# Altium PCB PCB1.PcbDoc (part 1 of 2)
Units mil, origin at the board's own origin, x right, y up, seen from the top; angles counter-clockwise.
Board outline 2342.52 x 4192.91 mil, 4 copper layers (Top Layer, Ground Layer, Power Layer, Bottom Layer), stack 58.662 mil thick; 150 components, 92 nets, 452 pads, 265 vias.
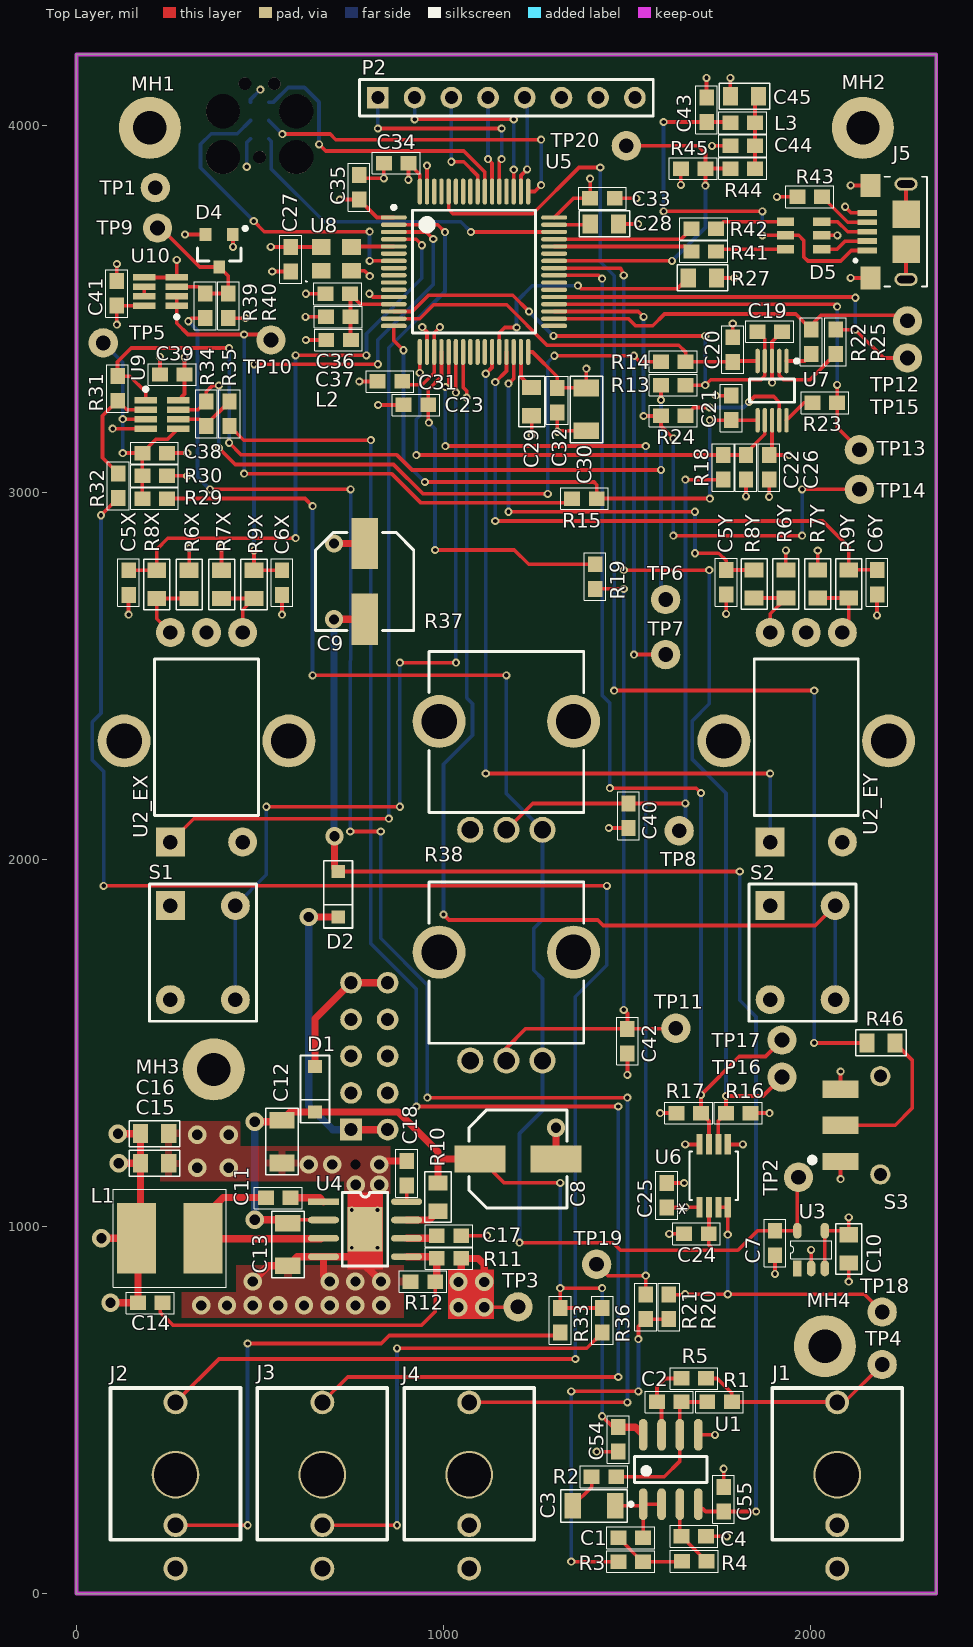
[diagram p0: Top Layer view]
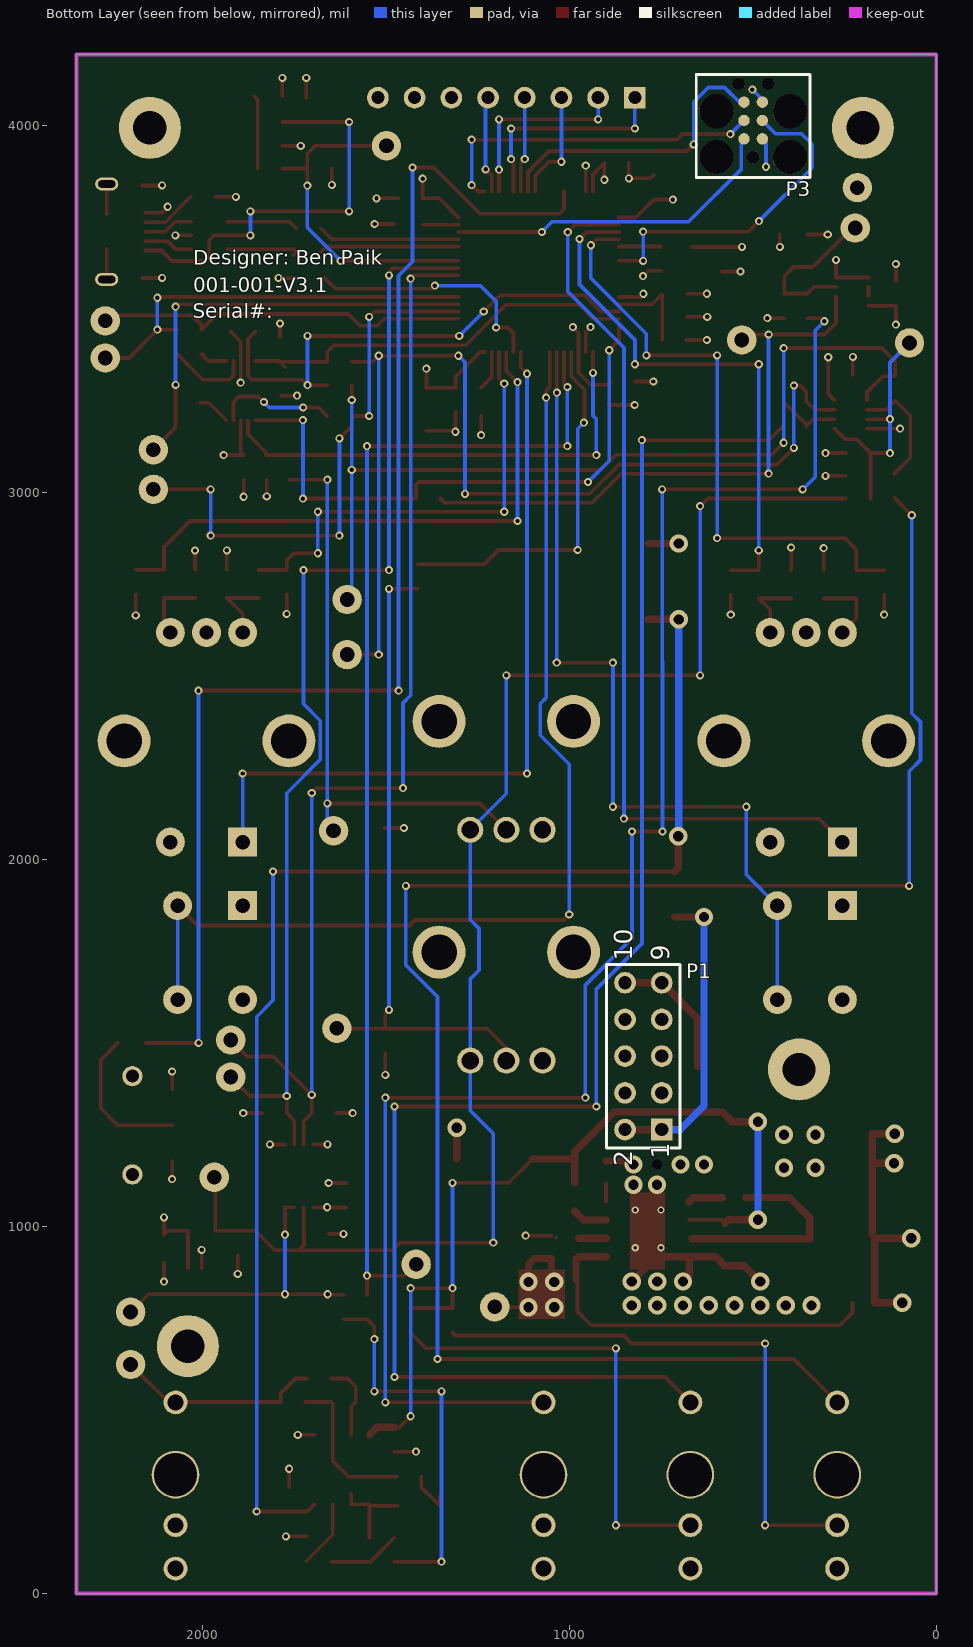
[diagram p1: Bottom Layer view, seen from below]
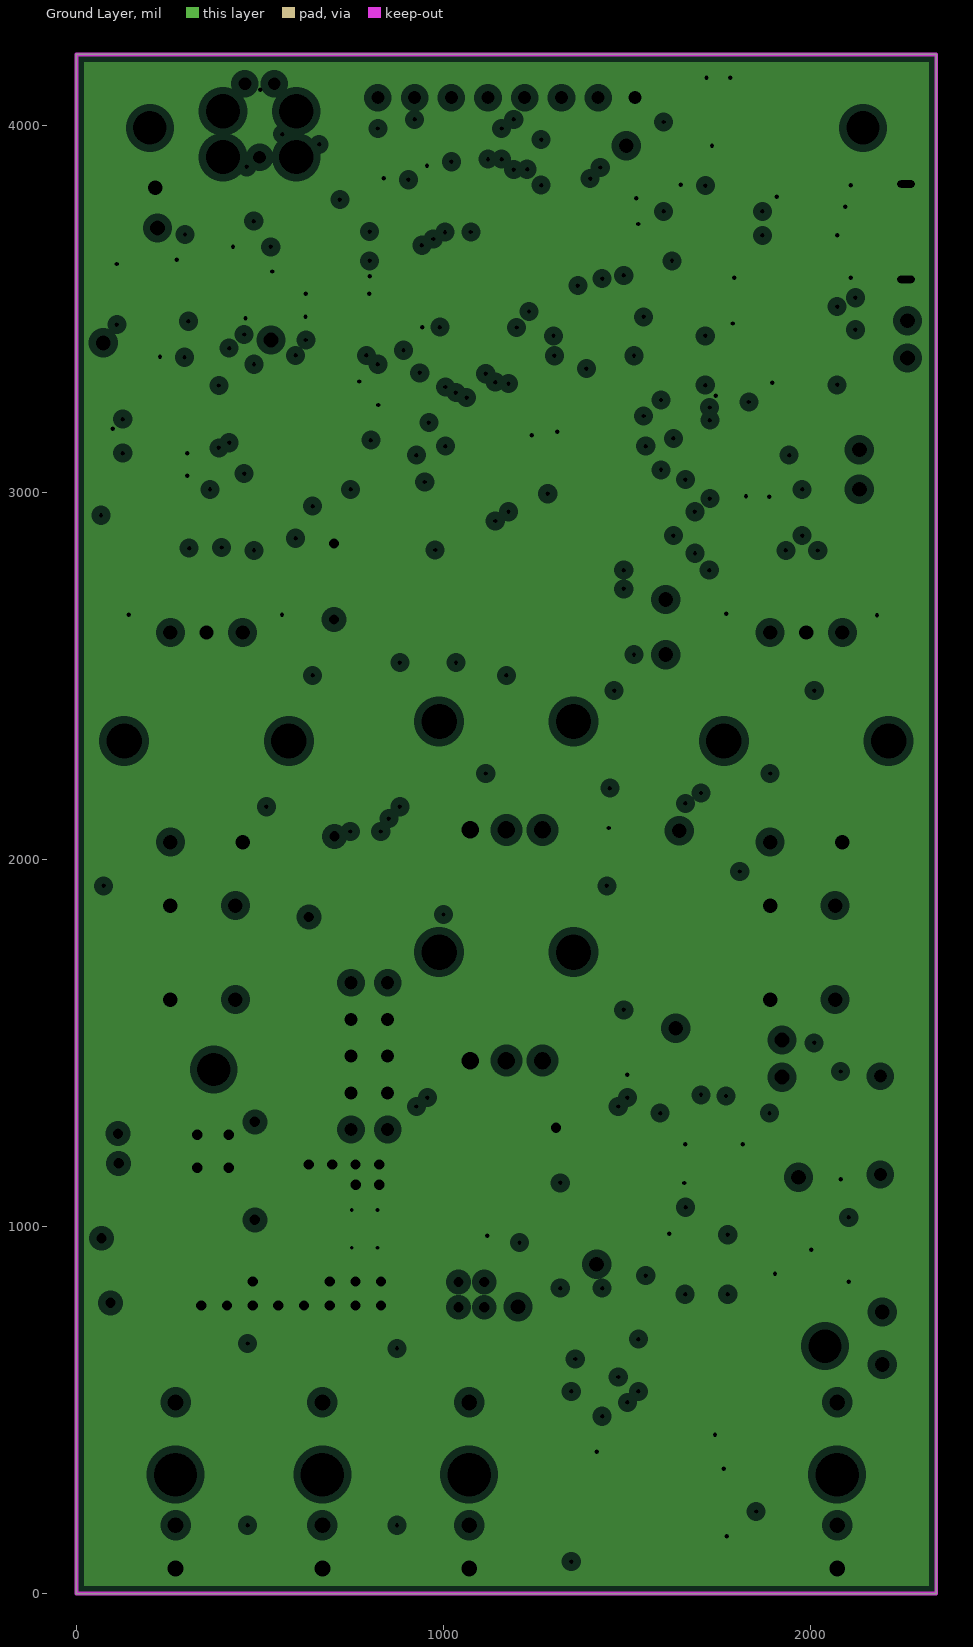
[diagram p2: Ground Layer, clearances drawn from the general rule]
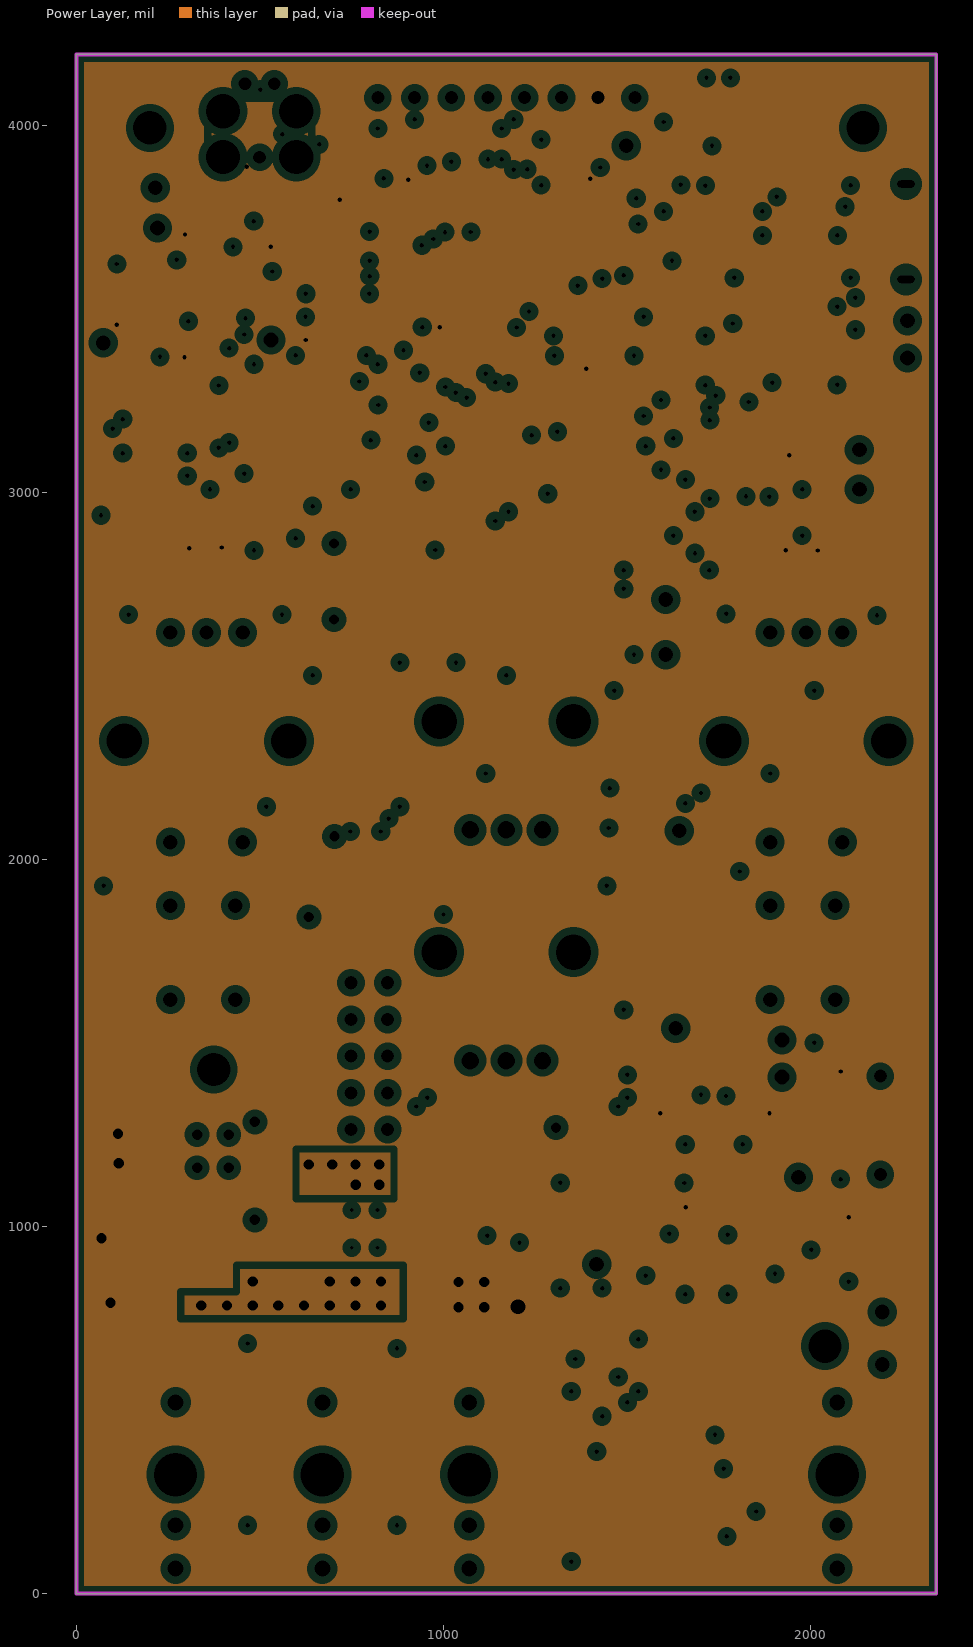
[diagram p3: Power Layer, clearances drawn from the general rule]
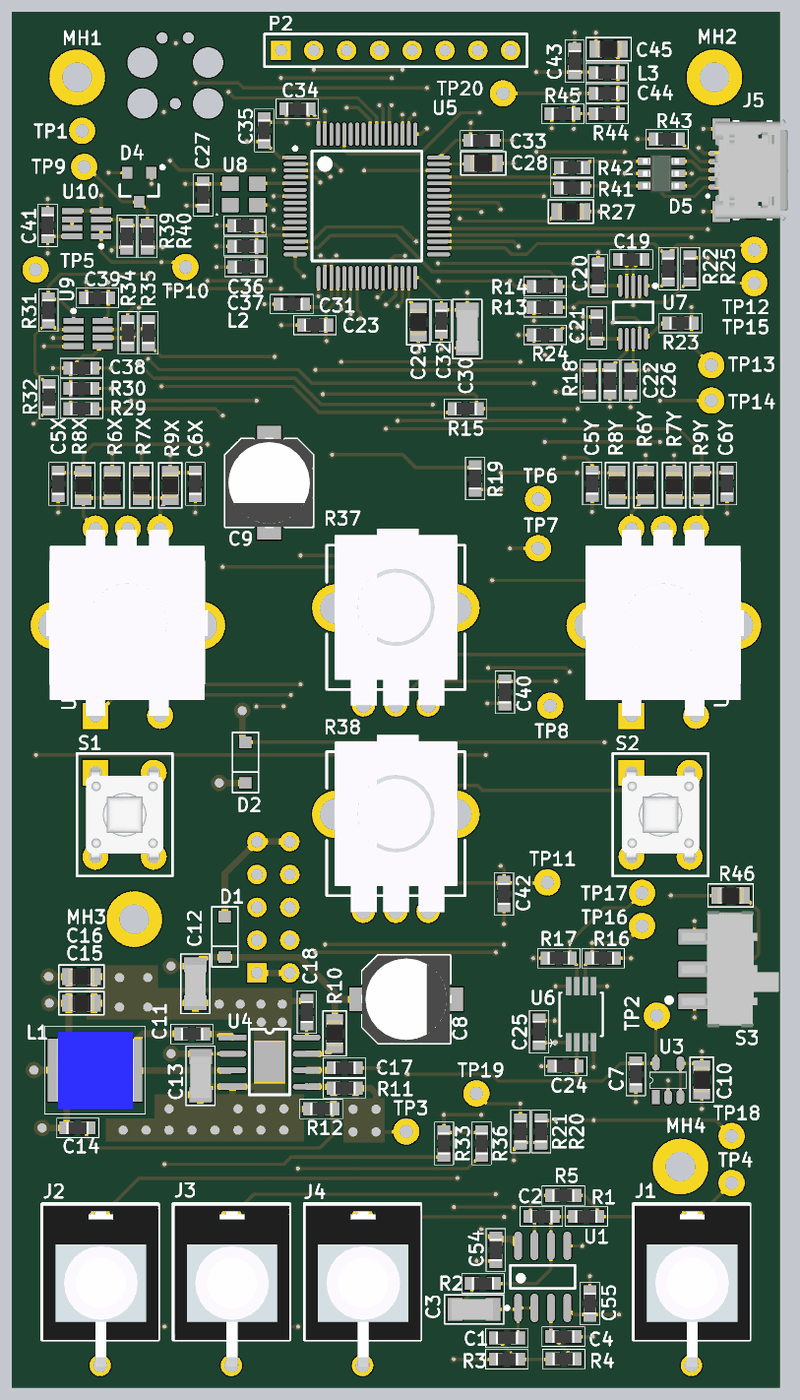
[diagram p5: 3D render of the assembled board from above, using the file's embedded part models]

## Layer stack, top to bottom
Top Solder: solder mask 1, Solder Resist, Dk 3.5
Top Layer: signal copper 1.378
Dielectric 1: core 4.33, FR-4, Dk 4.29
Ground Layer: plane copper 1.378, net GND
Dielectric 2: prepreg 44.49, FR-4, Dk 3.96
Power Layer: plane copper 1.378, net (Multiple Nets)
Dielectric 3: core 4.33, FR-4, Dk 4.29
Bottom Layer: signal copper 1.378
Bottom Solder: solder mask 1, Solder Resist, Dk 3.5

## Board outline
0,0 2342.52,0 2342.52,4192.91 0,4192.91

## Design rules (kind name [scope] priority, off if disabled: settings)
AssemblyTestPointUsage AssemblyTestPointUsage_1 [All] p2:
AssemblyTestpoint AssemblyTestpoint_1 [All] p2: testpointundercomponent=TRUE minsize=40 maxsize=100 preferedsize=60 minholesize=0 maxholesize=40 preferedholesize=32 testpointgrid=1 usegrid=TRUE gridtolerance=0.01 allowsidetop=TRUE allowsidebottom=TRUE
Clearance Clearance_1 [All] p1: gap=8 ignorepadtopadclearanceinfootprint=FALSE except(0: Arc-Hole Track-Hole SMDPad-Hole THPad-Hole Via-Hole Fill-Hole Poly-Hole Region-Hole Text-Hole; 5: SMDPad-SMDPad)
Clearance Clearance_3 [All] p2: gap=10 ignorepadtopadclearanceinfootprint=FALSE except(0: Arc-Hole Track-Hole SMDPad-Hole THPad-Hole Via-Hole Fill-Hole Poly-Hole Region-Hole Text-Hole)
Clearance Clearance_2 [All] p3: gap=10 ignorepadtopadclearanceinfootprint=FALSE except(0: Arc-Hole Track-Hole SMDPad-Hole THPad-Hole Via-Hole Fill-Hole Poly-Hole Region-Hole Text-Hole)
Clearance [All] p4: gap=10 ignorepadtopadclearanceinfootprint=FALSE except(0: Arc-Hole Track-Hole SMDPad-Hole THPad-Hole Via-Hole Fill-Hole Poly-Hole Region-Hole Text-Hole)
ComponentClearance ComponentClearance_1 [All] p2: gap=10 collisioncheckmode=3 verticalgap=10 showdistances=FALSE
DiffPairsRouting DiffPairsRouting_1 [All] p2: maxlimit=10 minlimit=10 mostfreqgap=10 toplayer_minwidth=15 toplayer_maxwidth=15 toplayer_prefwidth=15 bottomlayer_minwidth=15 bottomlayer_maxwidth=15 bottomlayer_prefwidth=15 maxuncoupledlength=500
FabricationTestPointUsage FabricationTestPointUsage_1 [All] p2: valid=0 allowmultiple=FALSE
FabricationTestpoint FabricationTestpoint_1 [All] p2: side=3 testpointundercomponent=TRUE minsize=40 maxsize=100 preferedsize=60 minholesize=0 maxholesize=40 preferedholesize=32 testpointgrid=1 allowsidetop=TRUE allowsidebottom=TRUE usegrid=TRUE gridtolerance=0.01
FanoutControl Fanout_LCC [IsLCC] p1: bgadir=Out bgaviamode=Centered fanoutstyle=Auto fanoutdirection=Alternating viagrid=1 // Fanout_LCC (Default Rule)
FanoutControl Fanout_BGA [IsBGA] p2: bgadir=Out bgaviamode=Centered fanoutstyle=Auto fanoutdirection=Alternating viagrid=1 // Fanout_BGA (Default Rule)
FanoutControl Fanout_Default [All] p4: bgadir=Out bgaviamode=Centered fanoutstyle=Auto fanoutdirection=Alternating viagrid=1 // Fanout_Default (Default Rule)
FanoutControl Fanout_Small [(CompPinCount < 5)] p5: bgadir=Out bgaviamode=Centered fanoutstyle=Auto fanoutdirection=OutThenIn viagrid=1 // Fanout_Small (Default Rule)
FanoutControl Fanout_BGA_1 [IsBGA] p6: bgadir=Out bgaviamode=Centered fanoutstyle=Auto fanoutdirection=Alternating viagrid=1 // Fanout_BGA (Default Rule)
FanoutControl Fanout_LCC_1 [IsLCC] p7: bgadir=Out bgaviamode=Centered fanoutstyle=Auto fanoutdirection=Alternating viagrid=1 // Fanout_LCC (Default Rule)
FanoutControl Fanout_SOIC_1 [IsSOIC] p8: bgadir=Out bgaviamode=Centered fanoutstyle=Auto fanoutdirection=Alternating viagrid=1 // Fanout_SOIC (Default Rule)
FanoutControl Fanout_Small_1 [(CompPinCount < 5)] p9: bgadir=Out bgaviamode=Centered fanoutstyle=Auto fanoutdirection=OutThenIn viagrid=1 // Fanout_Small (Default Rule)
FanoutControl Fanout_Default_1 [All] p10: bgadir=Out bgaviamode=Centered fanoutstyle=Auto fanoutdirection=Alternating viagrid=1 // Fanout_Default (Default Rule)
Height Height_1 [All] p2: minheight=0 maxheight=1000 prefheight=500
HoleSize HoleSize_1 [All] p1: absolutevalues=TRUE maxlimit=150 minlimit=1 maxpercent=80.000 minpercent=20.000
HoleSize [All] p2: absolutevalues=TRUE maxlimit=100 minlimit=1 maxpercent=80.000 minpercent=20.000
HoleToHoleClearance HoleToHoleClearance_1 [All] p2: gap=10 allowstackedmicrovias=TRUE
LayerPairs LayerPairs_1 [All] p2: enforce=TRUE
MinimumSolderMaskSliver MinimumSolderMaskSliver_1 [All] p1: minsoldermaskwidth=1
MinimumSolderMaskSliver [All] p2: minsoldermaskwidth=10
NetAntennae NetAntennae_1 [All] p2: netantennaetolerance=0
PasteMaskExpansion PasteMaskExpansion_1 [All] p2: expansion=0
PlaneClearance [All] p1: clearance=20
PlaneClearance PlaneClearance_1 [All] p2: clearance=20
PlaneConnect PlaneConnect_Default [All] p1: planeconnectstyle=Direct reliefexpansion=20 reliefentries=4 reliefconductorwidth=10 reliefairgap=10
PlaneConnect [All] p2: planeconnectstyle=Relief reliefexpansion=20 reliefentries=4 reliefconductorwidth=10 reliefairgap=10
PlaneConnect PlaneConnect_Pad [IsPad] p3: planeconnectstyle=Relief reliefexpansion=20 reliefentries=4 reliefconductorwidth=10 reliefairgap=10
PolygonConnect [All] p1: connectstyle=Relief reliefconductorwidth=10 reliefentries=4 polygonreliefangle="90 Angle" airgapwidth=10
PolygonConnect PolygonConnect_Pad [IsPad vs InPolygonClass('All Polygons')] p2: connectstyle=Relief reliefconductorwidth=20 reliefentries=4 polygonreliefangle="90 Angle" airgapwidth=10
PolygonConnect PolygonConnect_Default [All] p3: connectstyle=Direct reliefconductorwidth=10 reliefentries=4 polygonreliefangle="90 Angle" airgapwidth=10
RoutingCorners RoutingCorners_1 [All] p2: cornerstyle=45-Degree minsetback=100 maxsetback=100
RoutingLayers RoutingLayers_1 [All] p2: top layer_v5=TRUE bottom layer_v5=TRUE
RoutingPriority RoutingPriority_1 [All] p2: routingpriority=0
RoutingTopology RoutingTopology_1 [All] p2: topology=Shortest
RoutingVias [All] p1: holewidth=28 width=50 viastyle="Through Hole" minholewidth=28 minwidth=50 maxholewidth=28 maxwidth=50
RoutingVias RoutingVias_1 [All] p2: holewidth=12 width=22 viastyle="Through Hole" minholewidth=10 minwidth=20 maxholewidth=28 maxwidth=50
ShortCircuit ShortCircuit_1 [All] p2: allowed=FALSE
SilkToBoardRegionClearance SilkToBoardRegionClearance_1 [All] p2:
SilkToSilkClearance SilkToSilkClearance_1 [All] p1: silktosilkclearance=1
SilkToSilkClearance [All] p2: silktosilkclearance=10
SilkToSolderMaskClearance SilkToSolderMaskClearance_1 [IsPad] p1: minsilkscreentomaskgap=1 clearancetoexposedcopper=TRUE
SilkToSolderMaskClearance [IsPad] p2: minsilkscreentomaskgap=10 clearancetoexposedcopper=TRUE
SolderMaskExpansion [All] p1: expansion=4 istentingtop=FALSE
SolderMaskExpansion SolderMaskExpansion_1 [All] p2: expansion=4 istentingtop=FALSE
UnRoutedNet UnRoutedNet_1 [All] p2:
UnpouredPolygon UnpouredPolygon_1 [All] p2:
Width Width_1 [All] p1: maxlimit=50 minlimit=10 preferedwidth=10 minimp=50.000000 maximp=50.000000 favimp=50.000000
Width [All] p2: maxlimit=10 minlimit=10 preferedwidth=10
20 further rules are at their usual default settings.

## Classes and differential pairs
component class U_Analog: C38 C39 C40 C41 C42 D4 J2 J3 J4 R29 R30 R31 R32 R33 R34 R35 R36 R37 R38 R39 R40 TP5 TP6 TP7 TP8 TP9 TP10 TP11 U9 U10
component class U_Audio: C1 C2 C3 C4 C54 C55 J1 R1 R2 R3 R4 R5 TP4 U1
component class U_Communications: C43 C44 C45 D5 J5 L3 R41 R42 R43 R44 R45 R46 S3 TP20
component class U_Encoders_X: C5X C6X R6X R7X R8X R9X U2_EX
component class U_Encoders_Y: C5Y C6Y R7Y R9Y U2_EY
component class "U_Power Supplies": C7 C8 C9 C10 C11 C12 C13 C14 C15 C16 C17 C18 D1 D2 L1 P1 R10 R11 R12 TP1 TP2 TP3 U3 U4
component class U_Processor: C19 C20 C21 C22 C23 C24 C25 C26 C27 C28 C29 C30 C31 C32 C33 C34 C35 C36 C37 L2 P2 P3 R13 R14 R15 R16 R17 R18 R19 R20 R21 R22 R23 R24 R25 R27 S1 S2 TP12 TP13 TP14 TP15 TP16 TP17 TP18 TP19 U5 U6 U7 U8
channel class Encoders: U_Encoders_X U_Encoders_Y
component class "Top Level": MH1 MH2 MH3 MH4

## Components (designator, comment, footprint, x,y, rotation, side; value= is the part's Value field where it differs from the comment)
C1 "CC0603JRNPO9BN101" RES_0603 1510,152 r0 top value=100pF
C2 "06031A470FAT2A" RES_0603 1615,522 r0 top value=47pF
C3 "GRT31CR61H106ME01L" RES_1206 1410,239 r180 top value=10uF
C4 "CC0603JRNPO9BN101" RES_0603 1682,156 r180 top value=100pF
C5X "06035G104ZAT2A" RES_0603 142,2754.23 r90 top value=100nF (schematic designator C5)
C5Y "06035G104ZAT2A" RES_0603 1770,2755 r90 top value=100nF (schematic designator C5)
C6X "06035G104ZAT2A" RES_0603 560,2754.23 r90 top value=100nF (schematic designator C6)
C6Y "06035G104ZAT2A" RES_0603 2181,2755 r90 top value=100nF (schematic designator C6)
C7 "06035G104ZAT2A" RES_0603 1903,955 r90 top value=100nF
C8 "EEE-FK1V470P" CAPAE_UW_J_6.3mm 1203,1184 r0 top value=47uF
C9 "EEE-FK1V470P" CAPAE_UW_J_6.3mm 785.14,2757.18 r270 top value=47uF
C10 "CL21A475KACLRNC" RES_0805 2104,939 r90 top value=4.7uF
C11 "06035G104ZAT2A" RES_0603 550,1078 r0 top value=100nF
C12 "GRT31CR61H106ME01L" RES_1206 560,1231 r270 top value=10uF
C13 "GRT31CR61H106ME01L" RES_1206 576,951 r270 top value=10uF
C14 "C0603C220J5GACTU" RES_0603 201,792 r0 top value=22pF
C15 "CL21A226KPCLRNC" RES_0805 213,1172 r0 top value=22uF
C16 "CL21A226KPCLRNC" RES_0805 213,1253 r0 top value=22uF
C17 "CL10A105KA8NNNC" RES_0603 1015,975 r180 top value=1uF
C18 "CL10B103KB8NCNC" RES_0603 900,1145 r270 top value=10nF
C19 "06035G104ZAT2A" RES_0603 1889,3438 r0 top value=100nF
C20 "06035G104ZAT2A" RES_0603 1788,3389 r90 top value=100nF
C21 "06035G104ZAT2A" RES_0603 1784,3230 r90 top value=100nF
C22 "06035G104ZAT2A" RES_0603 1824,3068 r270 top value=100nF
C23 "06035G104ZAT2A" RES_0603 925,3238 r180 top value=100nF
C24 "06035G104ZAT2A" RES_0603 1689,980 r0 top value=100nF
C25 "06035G104ZAT2A" RES_0603 1608,1085 r270 top value=100nF
C26 "06035G104ZAT2A" RES_0603 1887,3068 r90 top value=100nF
C27 "CL10B103KB8NCNC" RES_0603 584,3635 r90 top value=10nF
C28 "C2012JB1E225M125AC" RES_0805 1438,3731 r180 top value=2.2uF
C29 "C2012JB1E225M125AC" RES_0805 1240,3247 r90 top value=2.2uF
C30 "GRT31CR61H106ME01L" RES_1206 1389,3226 r270 top value=10uF
C31 "06035G104ZAT2A" RES_0603 854,3302 r0 top value=100nF
C32 "06035G104ZAT2A" RES_0603 1310,3251 r90 top value=100nF
C33 "06035G104ZAT2A" RES_0603 1433,3801 r180 top value=100nF
C34 "06035G104ZAT2A" RES_0603 871,3897 r0 top value=100nF
C35 "06035G104ZAT2A" RES_0603 770,3831 r270 top value=100nF
C36 "CL10A105KA8NNNC" RES_0603 712,3541 r0 top value=1uF
C37 "06035G104ZAT2A" RES_0603 713,3478 r0 top value=100nF
C38 "06035G104ZAT2A" RES_0603 213,3107 r180 top value=100nF
C39 "CL10A105KA8NNNC" RES_0603 261,3321 r0 top value=1uF
C40 "06035G104ZAT2A" RES_0603 1504,2119 r90 top value=100nF
C41 "CL10A105KA8NNNC" RES_0603 110,3542 r270 top value=1uF
C42 "06035G104ZAT2A" RES_0603 1501,1505 r90 top value=100nF
C43 "CL10B103KB8NCNC" RES_0603 1716.54,4042.32 r270 top value=10nF
C44 "06035G104ZAT2A" RES_0603 1815.07,3943.94 r0 top value=100nF
C45 "CL21A475KACLRNC" RES_0805 1819.88,4078.74 r0 top value=4.7uF
C54 "06035G104ZAT2A" RES_0603 1476,420 r90 top value=100nF
C55 "06035G104ZAT2A" RES_0603 1763,257 r270 top value=100nF
D1 "1N5819HW-7-F" SOD123 650,1436 r270 top
D2 "1N5819HW-7-F" SOD123 713,1967 r270 top
D4 "BAT54SLT1G" SOT23 389,3658 r270 top
D5 "USBLC6-2SC6" SOT23-6L 1981,3700 r180 top
J1 "PJ301BM Jacks" WQP-PJ301M-12_JACK 2072.52,324 r0 top
J2 "PJ301BM Jacks" WQP-PJ301M-12_JACK 270,324 r0 top
J3 "PJ301BM Jacks" WQP-PJ301M-12_JACK 670,324 r0 top
J4 "PJ301BM Jacks" WQP-PJ301M-12_JACK 1070,324 r0 top
J5 "10118193-0001LF" 10118193-0001LF 2260,3710 r90 top
L1 "VLS6045EX-3R3N" INDPM6060X450N 254,968 r0 top value=3.3uH
L2 "742792651" RES_0603 714,3415 r0 top value="600 OHM"
L3 "BLM18PG221SZ1D" RES_0603 1815.07,4006.94 r0 top value="220 OHM"
MH1 "MH" M2_P 200,3992.91 r0 top
MH2 "MH" M2_P 2142.52,3992.91 r0 top
MH3 "MH" M2_P 374,1428 r0 top
MH4 "MH" M2_P 2039,674 r0 top
P1 "67997-410HLF" HDR2X5 748,1264 r90 bottom
P2 "PPTC081LFBN-RC" HDR1X8 821.26,4075 r0 top
P3 "Header 6" TC2030-MCP 499,3913 r90 bottom
R1 "RR0816P-104-D" RES_0603 1752,522 r180 top value=100K
R2 "ERA-3AEB2492V" RES_0603 1437,318 r180 top value=24.9K
R3 "ERA-3AEB393V" RES_0603 1510,87 r180 top value=39K
R4 "ERA-3AEB393V" RES_0603 1683,88 r180 top value=39K
R5 "RR0816P-102-D" RES_0603 1682,586 r180 top value=1K
R6X "RR1220P-103-D" RES_0805 306.94,2749.35 r90 top value=10K (schematic designator R6)
R6Y "RR1220P-103-D" RES_0805 1932.74,2750.35 r90 top value=10K (schematic designator R6)
R7X "RR1220P-103-D" RES_0805 395.34,2749.35 r270 top value=10K (schematic designator R7)
R7Y "RR1220P-103-D" RES_0805 2019.54,2750.35 r270 top value=10K (schematic designator R7)
R8X "RR1220P-103-D" RES_0805 218.54,2749.35 r90 top value=10K (schematic designator R8)
R8Y "RR1220P-103-D" RES_0805 1845.94,2750.35 r90 top value=10K (schematic designator R8)
R9X "RR1220P-103-D" RES_0805 483.74,2749.35 r90 top value=10K (schematic designator R9)
R9Y "RR1220P-103-D" RES_0805 2104,2750.35 r90 top value=10K (schematic designator R9)
R10 "RR1220P-103-D" RES_0805 985,1080 r270 top value=10K
R11 "ERA-3AEB8452V" RES_0603 1015,913 r180 top value=84.5k
R12 "ERA-3AEB2552V" RES_0603 944,850 r180 top value=25.5k
R13 "CRGP0603F56R" RES_0603 1626,3292 r180 top value="56 Ohm"
R14 "CRGP0603F56R" RES_0603 1626,3356 r180 top value="56 Ohm"
R15 "CRGP0603F56R" RES_0603 1384,2983 r180 top value="56 Ohm"
R16 "RR0816P-102-D" RES_0603 1803,1309 r180 top value=1K
R17 "RR0816P-102-D" RES_0603 1668,1309 r0 top value=1K
R18 "CRGP0603F56R" RES_0603 1762,3068 r270 top value="56 Ohm"
R19 "CRGP0603F56R" RES_0603 1413,2770.46 r270 top value="56 Ohm"
R20 "RC0603JR-070RL" RES_0603 1614,781 r90 top value="0 Ohm"
R21 "RC0603JR-070RL" RES_0603 1551,781 r90 top value="0 Ohm"
R22 "CRGP0603F56R" RES_0603 2002,3410 r90 top value="56 Ohm"
R23 "CRGP0603F56R" RES_0603 2039,3244 r0 top value="56 Ohm"
R24 "CRGP0603F56R" RES_0603 1626,3208 r180 top value="56 Ohm"
R25 "CRGP0603F56R" RES_0603 2068,3410 r90 top value="56 Ohm"
R27 "RR1220P-103-D" RES_0805 1705,3584 r180 top value=10K
R29 "ERA-3AEB392V" RES_0603 213,2983 r180 top value=3.9K
R30 "ERA-3AEB512V" RES_0603 213,3045 r0 top value=5.1K
R31 "ERA-3AEB1652V" RES_0603 112,3283 r270 top value=16.5K
R32 "RR0816P-104-D" RES_0603 114,3018 r270 top value=100K
R33 "ERA-3AEB393V" RES_0603 1318,744.46 r90 top value=39K
R34 "ERA-3AEB1652V" RES_0603 354,3214 r270 top value=16.5K
R35 "RR0816P-104-D" RES_0603 417,3214 r270 top value=100K
R36 "ERA-3AEB393V" RES_0603 1433,744.46 r90 top value=39K
R37 "P0915N-FC15BR10K" P0915NEC15BR100K 1072.84,2080.64 r0 top value=10K
R38 "P0915N-FC15BR10K" P0915NEC15BR100K 1072.84,1451.97 r0 top value=10K
R39 "ERA-3AEB4992V" RES_0603 351,3508 r270 top value=49.9K
R40 "ERA-3AEB4992V" RES_0603 414,3508 r270 top value=49.9K
R41 "CRGCQ0603J22R" RES_0603 1709,3656 r180 top value=22
R42 "CRGCQ0603J22R" RES_0603 1709,3718 r180 top value=22
R43 "RR0816P-104-D" RES_0603 1998,3805 r0 top value=100K
R44 "RR0816P-102-D" RES_0603 1815.07,3881.94 r180 top value=1K
R45 "A121524CT-ND" RES_0603 1680.07,3881.94 r180 top value=1.5K
R46 "RR1220P-103-D" RES_0805 2191.93,1500 r0 top value=10K
S1 "TL1105SPF250Q" E_SWITCH 255.91,1874 r0 top
S2 "TL1105SPF250Q" E_SWITCH 1889.76,1874 r0 top
S3 "JS102000SAQN" JS102011SAQN 2121.06,1275.59 r90 top
TP1 "loop test point" "Test Point Mt Hole" 215,3830 r0 top
TP2 "loop test point" "Test Point Mt Hole" 1967,1134 r0 top
TP3 "loop test point" "Test Point Mt Hole" 1203,781 r0 top
TP4 "loop test point" "Test Point Mt Hole" 2195,624 r0 top
TP5 "loop test point" "Test Point Mt Hole" 73,3407 r90 top
TP6 "loop test point" "Test Point Mt Hole" 1605,2708 r0 top
TP7 "loop test point" "Test Point Mt Hole" 1605,2558 r0 top
TP8 "loop test point" "Test Point Mt Hole" 1642,2078 r90 top
TP9 "loop test point" "Test Point Mt Hole" 221,3720 r0 top
TP10 "loop test point" "Test Point Mt Hole" 530,3415 r90 top
TP11 "loop test point" "Test Point Mt Hole" 1633,1540 r90 top
TP12 "loop test point" "Test Point Mt Hole" 2264,3467 r90 top
TP13 "loop test point" "Test Point Mt Hole" 2133,3116 r90 top
TP14 "loop test point" "Test Point Mt Hole" 2133,3008 r90 top
TP15 "loop test point" "Test Point Mt Hole" 2264,3366 r90 top
TP16 "loop test point" "Test Point Mt Hole" 1922,1407 r90 top
TP17 "loop test point" "Test Point Mt Hole" 1922,1508 r90 top
TP18 "loop test point" "Test Point Mt Hole" 2195,767 r0 top
TP19 "loop test point" "Test Point Mt Hole" 1417,897 r90 top
TP20 "loop test point" "Test Point Mt Hole" 1498,3944 r90 top
U1 "TL072CDT" TI-D8_N 1619,338 r90 top
U2_EX "PEC11L-4120F-S0020" ENC5 255.91,2047.24 r90 top (schematic designator U2)
U2_EY "PEC11L-4120F-S0020" ENC5 1889.76,2047.24 r90 top (schematic designator U2)
U3 "LM4132CQ1MFT2.5" LM4132CQ1MFT2.5 1964,886 r90 top
U4 "TPS54239EDDAR" DDA 673.07,1067.68 r0 top
U5 "STM32F405RGT6" STM-LQFP64_N 1083,3601 r0 top
U6 "DAC8571IDGKR" DGK8 1736,1138 r90 top
U7 "ADS1118IDGSR" TI-DGS10_N 1895,3277 r270 top
U8 "ASE-8.000MHZ-LC-T" ASE-8.000MHZ-LC-T 710,3636 r0 top
U9 "OPA2337EA/3K" SOT-23-8 233,3212 r0 top
U10 "OPA2337EA/3K" SOT-23-8 229,3547 r180 top

## Footprints (in the part's own frame and the unit in brackets; to place one, negate y for a bottom-side part, rotate by r counter-clockwise, add the part's x,y. Pads: shape width x height; smd on the part's side, far side on the other; paste and mask are expansions set on the pad)
10118193-0001LF [mm] "CONN RCPT USB2.0 MICRO B SMD R/A"
  rect 0.4x1.35 smd: 1(-1.3,2.675) 2(-0.65,2.675) 3(0,2.675) 4(0.65,2.675) 5(1.3,2.675)
  rect 1.6x1.4 smd: S1(-3.2,2.45) S2(3.2,2.45)
  rect 1.9x1.9 smd: S3(1.2,0) S4(-1.2,0)
  oval 0.9x1.6 hole 0.5 slot 1.2 at 90 deg: S5(-3.3,0) S6(3.3,0)
  silkscreen extent -3.8,-1.45 3.8,3.6, body extent -3.93,-2.71 3.93,2.95, height 2.88
ASE-8.000MHZ-LC-T [mm] "DFN, 4-Leads, Body 2.50x3.20mm, Pitch 2.20mm, IPC Medium Density"
  rect 1.3x1.1 smd: 1(-1.1,-0.825) 2(1,-0.825) 3(1,0.825) 4(-1.1,0.825)
  silkscreen extent -2.17,-1.6 -2.07,-1.5, body extent -1.67,-1.27 1.58,1.28, height 0.76
CAPAE_UW_J_6.3mm [mm] "Aluminum Electrolytic Capacitor, Body 6.60x6.60x5.50mm, IPC Low Density (From Nichicon UWJ_6.3mm)"
  rect 3.55x1.85 smd: 1(-2.625,0) 2(2.625,0)
  silkscreen extent -3.4,-3.4 3.4,3.4, body extent -3.5,-3.4 3.5,3.4, height 5.5
DDA [mm]
  rect 2.15x0.45 smd: 1(0,0)
  oval 2.15x0.45 smd: 2(0,-1.27) 3(0,-2.54) 4(0,-3.81) 5(5.75,-3.81) 6(5.75,-2.54) 7(5.75,-1.27) 8(5.75,0)
  rect 2.4x3.1 smd: 9(2.875,-1.905)
  silkscreen extent 1.3,-4.44 4.44,0.64, body extent 0.87,-4.43 4.87,0.58, height 1.7
DGK8 [mil]
  rect 56x17 smd paste+0 mask+0: 1(-85.5,38.39) 2(-85.5,12.8) 3(-85.5,-12.8) 4(-85.5,-38.39) 5(85.5,-38.39) 6(85.5,-12.8) 7(85.5,12.8) 8(85.5,38.39)
  silkscreen extent -66,-66 66,66, body extent -61,-61 61,61, height 39
E_SWITCH [mm]
  rect 2x2 hole 1: 1(0,0)
  round 2 hole 1: 2(0,-6.5) 3(4.5,0) 4(4.5,-6.5)
  silkscreen extent -1.45,-8 5.95,1.5, body extent -0.75,-7.2 5.25,0.7, height 7.41
ENC5 [mm] "Rotary Encoder with Button"
  rect 2x2 hole 1: 1(0,0)
  round 2 hole 1: 2(0,-5) 3(14.5,-5) 4(14.5,-2.5) 5(14.5,0)
  round 3.662 / inner round 1.524 / far side round 3.662 hole 2.441: ""(7,-8.2) ""(7,3.2)
  silkscreen extent 1.84,-6.1 12.66,1.1, body extent -0.01,-8.73 14.41,3.8, height 24.86
HDR1X8 [mm] "Connector; Header; 8 Position"
  rect 1.5x1.5 hole 0.9: 1(0,0)
  round 1.5 hole 0.9: 2(2.54,0) 3(5.08,0) 4(7.62,0) 5(10.16,0) 6(12.7,0) 7(15.24,0) 8(17.78,0)
  silkscreen extent -1.27,-1.27 19.05,1.27
HDR2X5 [mm] "Connector; Header; 5x2 Position"
  rect 1.5x1.5 hole 0.9: 1(0,0)
  round 1.5 hole 0.9: 2(0,2.54) 3(2.54,0) 4(2.54,2.54) 5(5.08,0) 6(5.08,2.54) 7(7.62,0) 8(7.62,2.54) 9(10.16,0) 10(10.16,2.54)
  silkscreen extent -1.27,-1.27 11.43,3.81
INDPM6060X450N [mil]
  rect 106.3x192.91 smd: 1(-90.55,0) 2(90.55,0)
  silkscreen extent -154,-134 154,134, body extent -117,-118 119,118, height 177
JS102011SAQN [mm]
  rect 1.2x2.5 smd: 1(-2.5,1) 2(0,1) 3(2.5,1)
  round 1.4 / inner round 1.524 / far side round 1.4 hole 0.9: ""(-3.4,-1.75) ""(3.4,-1.75)
  silkscreen extent -2.56,2.8 -2.24,3.12, body extent -4.5,-5.52 4.5,1.98, height 3.47
LM4132CQ1MFT2.5 [mm]
  rect 1.1x0.6 smd: 1(0,0)
  oval 1.1x0.6 smd: 2(0,-0.95) 3(0,-1.9) 4(2.6,-1.9) 5(2.6,0)
  silkscreen extent 0.67,-2.38 1.92,0.48, body extent 0.45,-2.45 2.15,0.45, height 1.45
M2_P [mm] "M2 Panhead Mounting Hole"
  round 4.3 hole 2.3: 1(0,0)
P0915NEC15BR100K [mil]
  round 70.87 / inner round 60 / far side round 70.87 hole 47.24: 1(0,0) 2(98.43,0) 3(196.85,0)
  round 144.17 / inner round 60 / far side round 144.17 hole 96.11: ""(-84.65,295.28) ""(281.5,295.28)
  silkscreen extent -112,47 309,486, body extent -89,-2 286,537, height 965
RES_0603 [mm] "Chip Resistor, 2-Leads, Body 1.60x0.82mm, IPC Medium Density"
  rect 1.1x1 smd: 1(-0.85,0) 2(0.85,0)
  silkscreen extent -1.65,-0.75 1.65,0.75, body extent -0.85,-0.48 0.85,0.48, height 0.6
RES_0805 [mm] "Surface Mount Resistor 0805"
  rect 1.05x1.3 smd: 1(-0.975,0) 2(0.975,0)
  silkscreen extent -1.75,-0.9 1.75,0.9, body extent -1,-0.63 1,0.63, height 0.43
RES_1206 [mm] "Chip Resistor, 2-Leads, Body 3.1x1.6mm, IPC Medium Density"
  rect 1.15x1.75 smd: 1(-1.475,0) 2(1.475,0)
  silkscreen extent -2.3,-1.13 2.3,1.12, body extent -1.47,-0.8 1.73,0.81, height 0.53
SOD123 [mm] "Diode; 2 Leads"
  rect 0.9x0.95 smd: 1(0,0) 2(3.15,0)
  silkscreen extent -0.75,-1 3.9,1, body extent 0.25,-0.75 2.9,0.75, height 1.05
SOT23 [mm] "SOT23, 3-Leads, Body 2.9x1.3mm, Pitch 0.95mm, Lead Span 2.3mm - Reverse Pinning, IPC Medium Density"
  rect 0.9x0.8 smd: 1(-1.125,0.95) 2(-1.125,-0.95) 3(1.125,0)
  silkscreen extent -1.67,-1.5 0.7,1.92, body extent -0.7,-1.5 0.7,1.5, height 1.1
SOT23-6L [mil]
  rect 47.24x23.62 smd: 1(-49.21,37.4) 2(-49.21,0) 3(-49.21,-37.4) 4(49.21,-37.4) 5(49.21,0) 6(49.21,37.4)
  body extent -54,-58 56,58, height 57
SOT-23-8 [mm] "SOT-23-8, 8-Leads, Body 3.0x1.8mm (max), Pitch 0.65mm, IPC Medium Density"
  rect 1.55x0.45 smd: 1(-1.125,0.975) 2(-1.125,0.325) 3(-1.125,-0.325) 4(-1.125,-0.975) 5(1.125,-0.975) 6(1.125,-0.325) 7(1.125,0.325) 8(1.125,0.975)
  silkscreen extent -1.25,1.63 -1,1.87, body extent -0.87,-1.5 0.88,1.5, height 1.45
STM-LQFP64_N [mm] "Thin QFP, 64-Leads, Body 10x10mm, Pitch 0.5mm, IPC Medium Density"
  oval 1.8x0.3 smd: 1(-5.55,3.75) 2(-5.55,3.25) 3(-5.55,2.75) 4(-5.55,2.25) 5(-5.55,1.75) 6(-5.55,1.25) 7(-5.55,0.75) 8(-5.55,0.25) 9(-5.55,-0.25) 10(-5.55,-0.75) 11(-5.55,-1.25) 12(-5.55,-1.75) 13(-5.55,-2.25) 14(-5.55,-2.75) 15(-5.55,-3.25) 16(-5.55,-3.75) 33(5.55,-3.75) 34(5.55,-3.25) 35(5.55,-2.75) 36(5.55,-2.25) 37(5.55,-1.75) 38(5.55,-1.25) 39(5.55,-0.75) 40(5.55,-0.25) 41(5.55,0.25) 42(5.55,0.75) 43(5.55,1.25) 44(5.55,1.75) 45(5.55,2.25) 46(5.55,2.75) 47(5.55,3.25) 48(5.55,3.75)
  oval 0.3x1.8 smd: 17(-3.75,-5.55) 18(-3.25,-5.55) 19(-2.75,-5.55) 20(-2.25,-5.55) 21(-1.75,-5.55) 22(-1.25,-5.55) 23(-0.75,-5.55) 24(-0.25,-5.55) 25(0.25,-5.55) 26(0.75,-5.55) 27(1.25,-5.55) 28(1.75,-5.55) 29(2.25,-5.55) 30(2.75,-5.55) 31(3.25,-5.55) 32(3.75,-5.55) 49(3.75,5.55) 50(3.25,5.55) 51(2.75,5.55) 52(2.25,5.55) 53(1.75,5.55) 54(1.25,5.55) 55(0.75,5.55) 56(0.25,5.55) 57(-0.25,5.55) 58(-0.75,5.55) 59(-1.25,5.55) 60(-1.75,5.55) 61(-2.25,5.55) 62(-2.75,5.55) 63(-3.25,5.55) 64(-3.75,5.55)
  silkscreen extent -5.67,-4.25 4.25,4.57, body extent -5,-5 5,5, height 1.6
TC2030-MCP [mil]
  round 31 smd: 1(50,-25) 2(50,25) 3(100,-25) 4(100,25) 5(150,-25) 6(150,25)
  round 34 hole 35 unplated: A(0,0) B(200,40) C(200,-40)
  round 92 hole 93 unplated: D(0,-100) E(125,-100) F(0,100) G(125,100)
  silkscreen extent -55,-155 225,155
"Test Point Mt Hole" [mil] "Test Point for 5000 series Keystone colored test points"
  round 80 hole 40: 1(0,0)
TI-D8_N [mm] "SOIC, 8-Leads, Body 4.9x3.9mm, Pitch 1.27mm, IPC Medium Density"
  oval 2.2x0.6 smd: 1(-2.4,1.905) 2(-2.4,0.635) 3(-2.4,-0.635) 4(-2.4,-1.905) 5(2.4,-1.905) 6(2.4,-0.635) 7(2.4,0.635) 8(2.4,1.905)
  silkscreen extent -2.52,-2.5 0.9,2.88, body extent -2,-2.5 2,2.5, height 1.75
TI-DGS10_N [mm] "SOP, 10-Leads, Body 3x3mm, Pitch 0.5mm, IPC Medium Density"
  oval 1.7x0.3 smd: 1(-2.05,1) 2(-2.05,0.5) 3(-2.05,0) 4(-2.05,-0.5) 5(-2.05,-1) 6(2.05,-1) 7(2.05,-0.5) 8(2.05,0) 9(2.05,0.5) 10(2.05,1)
  silkscreen extent -2.17,-1.55 0.8,1.83, body extent -1.55,-1.55 1.55,1.55, height 1.1
WQP-PJ301M-12_JACK [mm]
  round 1.65 / inner round 1.524 / far side round 1.65 hole 1.1: 1(0,-6.5) 2(0,-3.5) 3(0,5)
  round 3.3 hole 3: ""(0,0)
  silkscreen extent -4.5,-4.5 4.5,6, body extent -4.4,-6.59 4.5,5.87, height 13.9

## Part data
C1 C4: library part Cap, "Capacitor", Manufacturer=Yageo, Supplier Part Number 1=311-1069-1-ND, Manufacturer Part Number=CC0603JRNPO9BN101, Supplier 1=Digi-Key
C2: library part Cap, "Capacitor", Manufacturer="AVX Corporation", Supplier Part Number 1=478-3691-1-ND, Manufacturer Part Number=06031A470FAT2A, Supplier 1=Digi-Key
C3 C12 C13 C30: library part Cap, "Capacitor", Manufacturer=Murata, Supplier Part Number 1=490-12457-1-ND, Manufacturer Part Number=GRT31CR61H106ME01L, Supplier 1=Digi-Key
C5X C5Y C6X C6Y C7 C11 C19 C20 C21 C22 C23 C24 C25 C26 C31 C32 C33 C34 C35 C37 C38 C40 C42 C44 C54 C55: library part Cap, "Capacitor", Manufacturer="AVX Corporation", Supplier Part Number 1=478-3724-1-ND, Manufacturer Part Number=06035G104ZAT2A, Supplier 1=Digi-Key
C8 C9: library part "Cap Pol3", "Polarized Capacitor (Surface Mount)", Manufacturer=Panasonic, Supplier Part Number 1=PCE3842CT-ND, Manufacturer Part Number=EEE-FK1V470P, Supplier 1=Digi-Key
C10 C45: library part Cap, "Capacitor", Manufacturer="Samsung Electro-Mechanics", Supplier Part Number 1=1276-2415-1-ND, Manufacturer Part Number=CL21A475KACLRNC, Supplier 1=Digi-Key
C14: library part GJM0335C0J220JB01D, "Capacitor", Manufacturer=KEMET, Supplier Part Number 1=399-1053-1-ND, Manufacturer Part Number=C0603C220J5GACTU, Supplier 1=Digi-Key
C15 C16: library part C2012X5R1V226M125AC, "Capacitor", Manufacturer="Samsung Electro-Mechanics", Supplier Part Number 1=1276-6786-1-ND, Manufacturer Part Number=CL21A226KPCLRNC, Supplier 1=Digi-Key
C17 C36 C39 C41: library part Cap, "Capacitor", Manufacturer="Samsung Electro-Mechanics", Supplier Part Number 1=1276-1102-1-ND, Manufacturer Part Number=CL10A105KA8NNNC, Supplier 1=Digi-Key
C18 C27 C43: library part Cap, "Capacitor", Manufacturer="Samsung Electro-Mechanics", Supplier Part Number 1=1276-1921-1-ND, Manufacturer Part Number=CL10B103KB8NCNC, Supplier 1=Digi-Key
C28 C29: library part Cap, "Capacitor", Manufacturer=TDK, Supplier Part Number 1=810-C2012JB1E225M12C, Manufacturer Part Number=C2012JB1E225M125AC, Supplier 1=Mouser
D1 D2: library part Diode, "Default Diode", Manufacturer="Diodes Incorporated", Supplier Part Number 1=1N5819HW-FDICT-ND, Manufacturer Part Number=1N5819HW-7-F, Supplier 1=Digi-Key
D4: library part "SCHOTTKY DIODE ARRAY", "DIODE ARRAY SCHOTTKY", Manufacturer="ON Semiconductor", Supplier Part Number 1=BAT54SLT1GOSCT-ND, Manufacturer Part Number=BAT54SLT1G, Supplier 1=Digi-Key
D5: "TVS DIODE 5.25V 17V SOT23-6", Manufacturer=STMicroelectronics, Supplier Part Number 1=497-5235-1-ND, Manufacturer Part Number=USBLC6-2SC6, Supplier 1=Digi-Key
J1 J2 J3 J4: library part "Phonejack2 TN", "Jack Socket, 1/4\" [6.5mm], Thru-Hole, Vertical, 2-Conductor with Tip closed", Manufacturer=Thonkiconn, Manufacturer Part Number="PJ301BM Jacks"
J5: "Single Port 5 Contact Shielded SMT MICRO USB B-Type Receptacle", Manufacturer="Amphenol ICC", Supplier Part Number 1=609-4616-1-ND, Manufacturer Part Number=10118193-0001LF, Supplier 1=Digi-Key
L1: library part CLF7045T-3R3N, "Inductor", Manufacturer=TDK, Supplier Part Number 1=810-VLS6045EX-3R3N, Manufacturer Part Number=VLS6045EX-3R3N, Supplier 1=Mouser
L2: library part Inductor, "Inductor", Manufacturer="Wurth Electronics Inc.", Supplier Part Number 1=732-1593-2-ND, Manufacturer Part Number=742792651, Supplier 1=Digi-Key
L3: library part Inductor, "Inductor", Manufacturer="Murata Electronics", Supplier Part Number 1=490-16588-1-ND, Manufacturer Part Number=BLM18PG221SZ1D, Supplier 1=Digi-Key
MH1 MH2 MH3 MH4: "Mounting Hole"
P1: library part "Header 5X2", "Header, 5-Pin, Dual row", Manufacturer="Amphenol FCI", Supplier Part Number 1=609-3243-ND, Manufacturer Part Number=67997-410HLF, Supplier 1=Digi-Key
P2: library part MHDR1X8, "Header, 8-Pin", Manufacturer="Sullins Connector Solutions", Supplier Part Number 1=S7006-ND, Manufacturer Part Number=PPTC081LFBN-RC, Supplier 1=Digi-Key
P3: "Header, 6-Pin", LatestRevisionDate=17-Jul-2002, LatestRevisionNote="Re-released for DXP Platform.", Publisher="Altium Limited"
R1 R32 R35 R43: library part Res3, "Resistor", Manufacturer=Susumu, Supplier Part Number 1=RR08P100KDCT-ND, Manufacturer Part Number=RR0816P-104-D, Supplier 1=Digi-Key
R2: library part Res3, Manufacturer="Panasonic Electronic Components", Supplier Part Number 1=P24.9KDBCT-ND, Manufacturer Part Number=ERA-3AEB2492V, Supplier 1=Digi-Key
R3 R4 R33 R36: library part Res3, Manufacturer="Panasonic Electronic Components", Supplier Part Number 1=P39KDBCT-ND, Manufacturer Part Number=ERA-3AEB393V, Supplier 1=Digi-Key
R5 R16 R17 R44: library part Res3, "Resistor", Manufacturer=Susumu, Supplier Part Number 1=RR08P1.0KDDKR-ND, Manufacturer Part Number=RR0816P-102-D, Supplier 1=Digi-Key
R6X R6Y R7X R7Y R8X R8Y R9X R9Y R10 R27 R46: library part Res3, "Resistor", Manufacturer=Susumu, Supplier Part Number 1=RR12P10.0KDCT-ND, Manufacturer Part Number=RR1220P-103-D, Supplier 1=Digi-Key
R11: library part CRCW040284K5FKED, "Resistor", Manufacturer="Panasonic Electronic Components", Supplier Part Number 1=P84.5KDBCT-ND, Manufacturer Part Number=ERA-3AEB8452V, Supplier 1=Digi-Key
R12: library part CRCW040225K5FKED, "Resistor", Manufacturer="Panasonic Electronic Components", Supplier Part Number 1=P25.5KDBCT-ND, Manufacturer Part Number=ERA-3AEB2552V, Supplier 1=Digi-Key
R13 R14 R15 R18 R19 R22 R23 R24 R25: library part R_Dup1, "Resistor", Manufacturer="TE Connectivity Passive Product", Supplier Part Number 1=A130401CT-ND, Manufacturer Part Number=CRGP0603F56R, Supplier 1=Digi-Key
R20 R21: library part Res3, "Resistor", Manufacturer=Yageo, Supplier Part Number 1=311-0.0GRCT-ND, Manufacturer Part Number=RC0603JR-070RL, Supplier 1=Digi-Key
R29: library part Res3, "Resistor", Manufacturer=Panasonic, Supplier Part Number 1=P3.9KDBCT-ND, Manufacturer Part Number=ERA-3AEB392V, Supplier 1=Digi-Key
R30: library part Res3, "Resistor", Manufacturer=Panasonic, Supplier Part Number 1=P5.1KDBCT-ND, Manufacturer Part Number=ERA-3AEB512V, Supplier 1=Digi-Key
R31 R34: library part Res3, "Resistor", Manufacturer=Panasonic, Supplier Part Number 1=P16.5KDBCT-ND, Manufacturer Part Number=ERA-3AEB1652V, Supplier 1=Digi-Key
R37 R38: library part RPot, "Potentiometer", Manufacturer="TT Electronics/BI", Supplier 1 Part Number=987-1649-ND, Manufacturer Part Number=P0915N-FC15BR10K, Supplier 1=Digi-Key
R39 R40: library part Res3, "Resistor", Manufacturer=Panasonic, Supplier Part Number 1=P49.9KDBTR-ND, Manufacturer Part Number=ERA-3AEB4992V, Supplier 1=Digi-Key
R41 R42: library part Res3, Manufacturer="TE Connectivity Passive Product", Supplier Part Number 1=A130081CT-ND, Manufacturer Part Number=CRGCQ0603J22R, Supplier 1=Digi-Key
R45: library part Res3, "Resistor", Manufacturer="TE Connectivity Passive Product", Supplier Part Number 1=CRG0603F1K5, Manufacturer Part Number=A121524CT-ND, Supplier 1=Digi-Key
S1 S2: library part "SPST E SWITCH", "SWITCH TACTILE SPST", Manufacturer=E-Switch, Supplier Part Number 1=EG1862-ND, Manufacturer Part Number=TL1105SPF250Q, Supplier 1=Digi-Key
S3: library part SW-SPDT, "SWITCH SLIDE SPDT 1MA 5V", Manufacturer=C&K, Manufacturer Part Number=JS102011SAQN, Supplier Part Number 1=401-1999-1-ND, Supplier 1=Digi-Key
TP1 TP2 TP3 TP4 TP5 TP6 TP7 TP8 TP9 TP10 TP11 TP12 TP13 TP14 TP15 TP16 TP17 TP18 TP19 TP20: library part 402046, "Test Point Loop Miniature Keysone", Manufacturer="Keystone Electronics", Manufacturer Part Number=5003, Supplier Part Number 1=36-5003-ND, Supplier 1=Digi-Key
U1: library part TL072CD, "IC OPAMP JFET 4MHZ 8SO", Manufacturer=STMicroelectronics, Supplier Part Number 1=497-2200-1-ND, Manufacturer Part Number=TL072CDT, Supplier 1=Digi-Key
U2_EX U2_EY: library part PEC11-4215F-S24, "Rotary Encoder with Switch", Manufacturer="Bourns Inc.", Supplier Part Number 1=PEC11L-4120F-S0020-ND, Manufacturer Part Number=PEC11L-4120F-S0020, Supplier 1=Digi-Key
U3: library part LM4132, "Precision Low Dropout 2.5V Reference", Manufacturer="Texas Instruments", Supplier 1 Part Number=296-48574-1-ND, Manufacturer Part Number=LM4132CQ1MFT2.5, Supplier 1=Digi-Key
U4: library part TPS54239EDDA, "4.5V to 23V Input, 2-A Synchronous Step-Down SWIFT™ Converter With Eco-mode", Manufacturer="Texas Instruments", Supplier Part Number 1=296-35690-1-ND, Manufacturer Part Number=TPS54239EDDAR, Supplier 1=Digi-Key
U5: "ARM Cortex-M4 32-bit MCU+FPU, 210 DMIPS, 1024 kB Flash, 192 kB Internal RAM, 51 I/Os, 64-pin LQFP, -40 to 85 degC, Tray", Manufacturer=STMicroelectronics, Supplier Part Number 1=497-11767-ND, Manufacturer Part Number=STM32F405RGT6, Supplier 1=Digi-Key
U6: Manufacturer="Texas Instruments", Supplier Part Number 1=296-14307-1-ND, Manufacturer Part Number=DAC8571IDGKR, Supplier 1=Digi-Key
U7: "16-Bit ADC with Integrated Multiplexer, PGA, Temperature Sensor, Oscillator, and Reference, -40 to 125 degC, 10-pin SOP (DGS10), Green (RoHS & no Sb/Br)", Manufacturer="Texas Instruments", Supplier Part Number 1=296-38850-1-ND, Manufacturer Part Number=ADS1118IDGSR, Supplier 1=Digi-Key
U8: "XTAL OSC XO 8.0000MHZ CMOS SMD", Manufacturer="Abracon LLC", Supplier Part Number 1=535-9558-1-ND, Manufacturer Part Number=ASE-8.000MHZ-LC-T, Supplier 1=Digi-Key
U9 U10: library part OPA2137E/2K5, "Low Cost FET-Input Operational Amplifier, 4.5 to 36 V, -40 to 85 degC, 8-pin SOP (DGK8), Green (RoHS & no Sb/Br)", Manufacturer="Texas Instruments", Supplier Part Number 1=296-26252-1-ND, Manufacturer Part Number=OPA2337EA/3K, Supplier 1=Digi-Key

## Via types
v1: diameter 22, hole 12, Top Layer to Bottom Layer, tented both sides, 224 vias
v2: diameter 50, hole 28, Top Layer to Bottom Layer, tented both sides, 34 vias
v3: diameter 20, hole 10, Top Layer to Bottom Layer, tented both sides, 4 vias
v4: diameter 50, hole 28, Top Layer to Bottom Layer, 2 vias
v5: diameter 0/0 (per signal layer), hole 28, Top Layer to Bottom Layer, tented both sides, 1 vias